# Altium PCB PCB_Test_Bench_Back_Scatter.PcbDoc
Units mil, origin at the board's own origin, x right, y up, seen from the top; angles counter-clockwise.
Board outline 6043.31 x 2165.35 mil, 2 copper layers (Top Layer, Bottom Layer); 13 components, 30 nets, 158 pads, 0 vias.
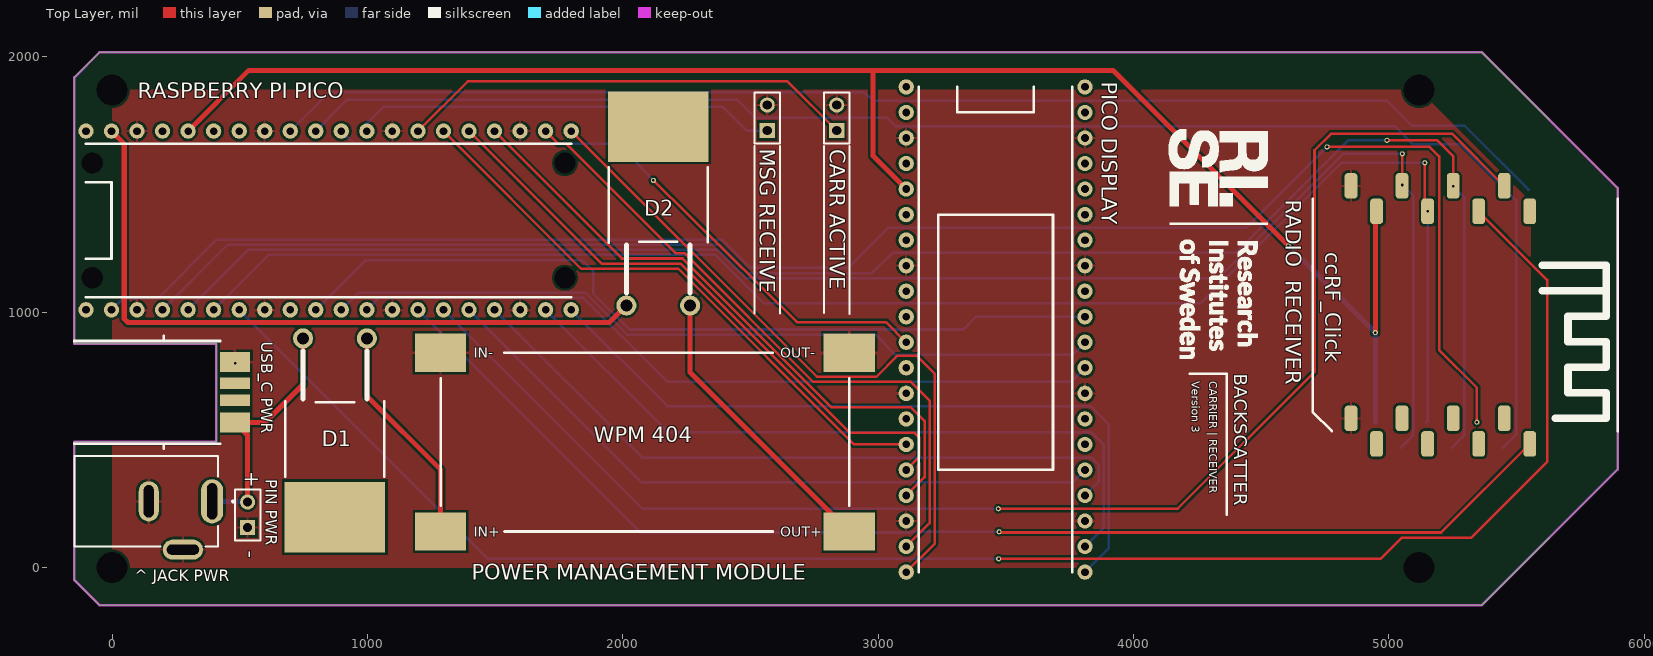
[diagram p0: Top Layer view]
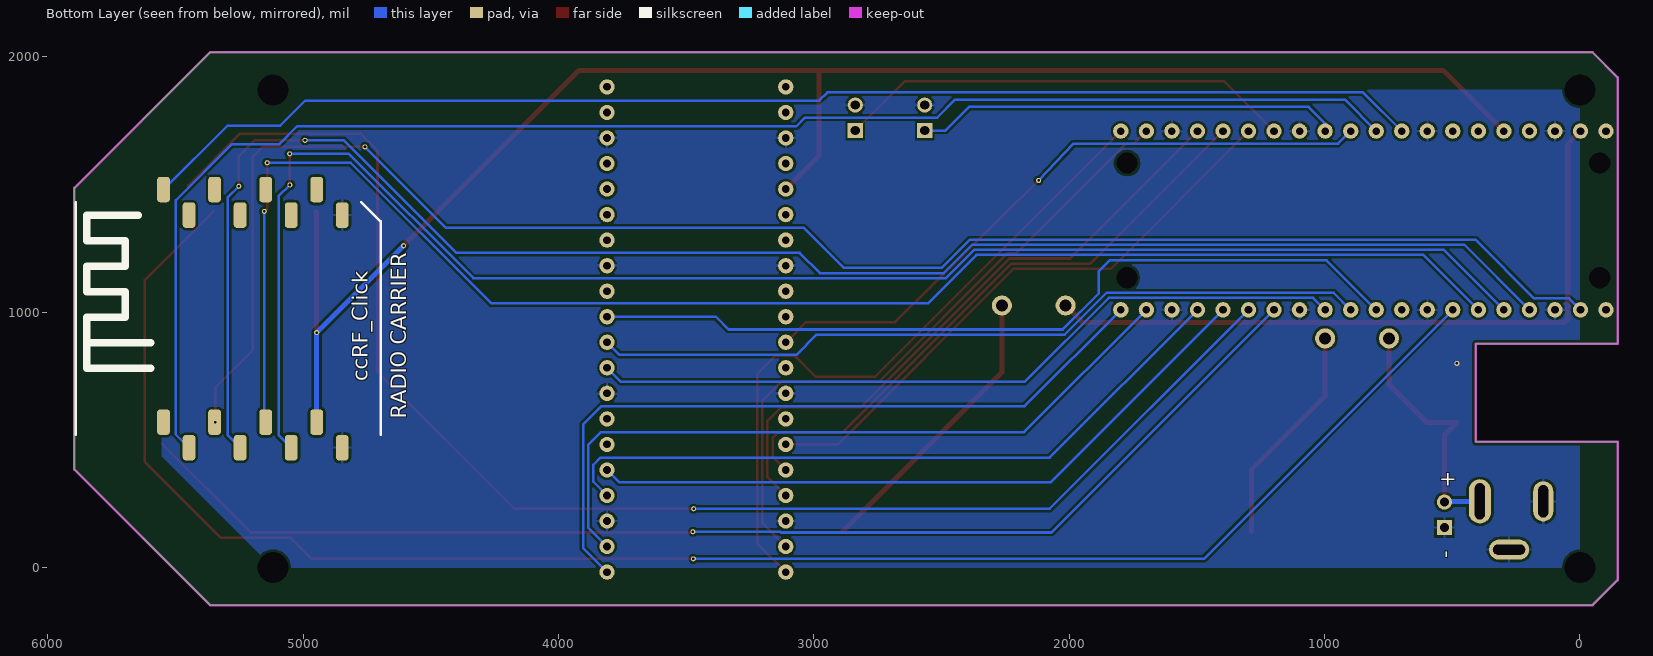
[diagram p1: Bottom Layer view, seen from below]

## Layer stack, top to bottom
Top Solder: solder mask 0.4, Solder Resist, Dk 3.5
Top Layer: signal copper 1.4
Dielectric 1: dielectric 12.6, FR-4, Dk 4.8
Bottom Layer: signal copper 1.4
Bottom Solder: solder mask 0.4, Solder Resist, Dk 3.5

## Board outline
-147.64,-49.21 -147.64,492 408,492 408,875.86 -147.64,875.86 -147.64,1919.29 -49.21,2017.72 5364.17,2017.72 5895.67,1486.22 5895.67,383.86 5364.17,-147.64 -49.21,-147.64

## Design rules (kind name [scope] priority, off if disabled: settings)
Clearance [All] p1: gap=10
PolygonConnect [All] p1: connectstyle=Relief reliefconductorwidth=10 reliefentries=4 polygonreliefangle="90 Angle" airgapwidth=10
RoutingVias [All] p1: holewidth=28 width=50 viastyle="Through Hole" minholewidth=28 minwidth=50 maxholewidth=28 maxwidth=50
SolderMaskExpansion [All] p1: expansion=4
UnpouredPolygon [All] p1: allowunpoured=FALSE
Width [All] p1: maxlimit=39.37 minlimit=10 preferedwidth=10
29 further rules are at their usual default settings.

## Components (designator, comment, footprint, x,y, rotation, side; value= is the part's Value field where it differs from the comment)
* "RISE_LOGO" RISE_Logo 4140,1717 r270 top
"^ JACK PWR" "DCJ200-10-A-XX-K_REVA" GCT_DCJ200-10-A-XX-K_REVA 134,259 r270 top (schematic designator J3)
"CARR ACTIVE" "LED_2" HDR1X2 2838,1711 r90 top (schematic designator P3)
D1 "Diode 18TQ045" 18TQ045-M3 998,897 r180 top
D2 "Diode 18TQ045" 18TQ045-M3 2014,1026 r0 top
"MSG RECEIVE" "LED_1" HDR1X2 2566,1711 r90 top (schematic designator P2)
"PICO DISPLAY" "Pico_Display" Pico_Display_Header 3110,1882 r0 top (schematic designator PI_DISP1)
"PIN PWR" "Header 2" HDR1X2 531,156 r90 top (schematic designator P1)
"POWER MANAGEMENT MODULE" "WPM_404" WPM404_SMD 1287,841 r0 top (schematic designator WPM1)
"RADIO  RECEIVER" "ccRF_Click" CCRF_CLICK_SMD 5552,1484 r270 top (schematic designator ccRF1)
"RADIO CARRIER" "ccRF_Click" CCRF_CLICK_SMD 5547,480 r90 bottom (schematic designator ccRF2)
"RASPBERRY PI PICO" "Raspberry Pi Pico" "Raspberry Pi Pico" -102,1009 r90 top (schematic designator PI1)
"USB_C PWR" "USB C Socket Breakout" Simple_USB_C_Socket_Breakout 423,505 r90 top (schematic designator USB_C1)

## Footprints (in the part's own frame and the unit in brackets; to place one, negate y for a bottom-side part, rotate by r counter-clockwise, add the part's x,y. Pads: shape width x height; smd on the part's side, far side on the other; paste and mask are expansions set on the pad)
18TQ045-M3 [mm]
  round 2 hole 1.2: 1(0,0) 3(6.35,0)
  rect 10x7 smd: ""(3.175,17.78)
  silkscreen extent -1.75,1.25 8.1,13.77
CCRF_CLICK_SMD [mm]
  rrect50% 2.54x1.27 smd: 0(2.27,0) 1(-0.27,-2.54) 2(2.27,-5.08) 3(-0.27,-7.62) 4(2.27,-10.16) 5(-0.27,-12.7) 6(2.27,-15.24) 7(-0.27,-17.78) 8(22.86,-17.78) 9(25.4,-15.24) 10(22.86,-12.7) 11(25.4,-10.16) 12(22.86,-7.62) 13(25.4,-5.08) 14(22.86,-2.54) 15(25.4,0)
  silkscreen extent 1,-21.59 24.13,8.75
GCT_DCJ200-10-A-XX-K_REVA [mm]
  oval 4.4x2.2 hole 1 slot 3.6 at 0 deg: 1(0,6.55)
  oval 4x2 hole 1 slot 3.2 at 0 deg: 2(0,0.25)
  oval 2x4 hole 1 slot 3.2 at 90 deg: 3(4.8,3.65)
  silkscreen extent -4.5,-7.15 4.5,8.75, body extent -4.5,-7.15 5.05,7.15, height 11
HDR1X2 [mm] "Connector; Header; 2 Position"
  rect 1.5x1.5 hole 0.9: 1(0,0)
  round 1.5 hole 0.9: 2(2.54,0)
  silkscreen extent -1.27,-1.27 3.81,1.27
Pico_Display_Header [mil]
  round 60 hole 30: 0(0,-200) 1(0,-400) 2(0,-700) 3(0,-1000) 4(0,-1200) 5(0,-1400) 6(0,-1500) 7(0,-1600) 8(0,-1700) 9(0,-1800) 10(0,-1900) 11(700,-1900) 12(700,-1800) 13(700,-1700) 14(700,-1600) 15(700,-1500) 16(700,-1200) 17(700,-1100) 18(700,-1000) 19(700,-900) 20(700,-700) 21(700,-200) NC(0,-1300) NC(0,-1100) NC(0,-900) NC(0,-800) NC(0,-600) NC(0,-500) NC(0,-300) NC(0,-100) NC(0,0) NC(700,-1400) NC(700,-1300) NC(700,-800) NC(700,-600) NC(700,-500) NC(700,-400) NC(700,-300) NC(700,-100) NC(700,0)
  silkscreen extent 50,-1900 650,0
"Raspberry Pi Pico" [mil]
  round 60 hole 30: 0(0,0) 1(0,-100) 2(0,-200) 3(0,-300) 4(0,-400) 5(0,-500) 6(0,-600) 7(0,-700) 8(0,-800) 9(0,-900) 10(0,-1000) 11(0,-1100) 12(0,-1200) 13(0,-1300) 14(0,-1400) 15(0,-1500) 16(0,-1600) 17(0,-1700) 18(0,-1800) 19(0,-1900) 20(700,-1900) 21(700,-1800) 22(700,-1700) 23(700,-1600) 24(700,-1500) 25(700,-1400) 26(700,-1300) 27(700,-1200) 28(700,-1100) 29(700,-1000) 30(700,-900) 31(700,-800) 32(700,-700) 33(700,-600) 34(700,-500) 35(700,-400) 36(700,-300) 37(700,-200) 38(700,-100) 39(700,0)
  round 60 hole 82.68: 51(125.59,-24.8) 51(125.59,-1875.2) 51(574.41,-24.8) 51(574.41,-1875.2)
  silkscreen extent 50,-1900 650,0
RISE_Logo [mil]
  silkscreen extent 0,0 900,386
Simple_USB_C_Socket_Breakout [mm] "Simple USB C Socket Breakout"
  rect 2x3 smd: 0(1.6,-1.5) 3(7.6,-1.5)
  rect 1.16x3 smd: 1(3.8,-1.5) 2(5.5,-1.5)
  silkscreen extent -1,0 10.2,14.5
WPM404_SMD [mil]
  rect 200x150 smd: 0(0,0) 1(0,-700) 2(1600,0) 3(1600,-700)
  silkscreen extent 0,-700 1600,0

## Part data
*: "RISE_Logo"
"^ JACK PWR": "Power Barrel Connector Jack 2.05mm ID (0.081), 5.50mm OD (0.217) Through Hole, Right Angle"
"CARR ACTIVE" "MSG RECEIVE": library part "Header 2", "Header, 2-Pin"
D1 D2: "Schottky Rectifier"
"PICO DISPLAY": library part Pico_Display_Header
"PIN PWR": "Header, 2-Pin"
"POWER MANAGEMENT MODULE": "Velleman WPM404 Whadda DC-DC Adjustable Voltage Step-Down Module LM2596S"
"RADIO  RECEIVER" "RADIO CARRIER": "ccRF_Click 2480MHz radio"
"RASPBERRY PI PICO": library part Raspberry_Pi_Pico_Header
"USB_C PWR": "Simple USB C Socket Breakout"

## Free pads (board coordinates)
  round 60 hole 122.05: FIX(0,0) FIX(0,1870.08) FIX(5118.11,0) FIX(5118.11,1870.08)
  round 20 hole 10: VIAS(482.06,799.21) VIAS(2120,1516) VIAS(3471,230) VIAS(3472,34) VIAS(3474,140) VIAS(4607,1260) VIAS(4758,1647) VIAS(4947,920) VIAS(4993,1673) VIAS(5052,1498) VIAS(5053,1620) VIAS(5141,1585) VIAS(5152,1394.63) VIAS(5252,1493) VIAS(5345,569)

## Nets (pads, with @x,y where several pads share a name; then routed paths per layer and width w, separated by ;. In a path a pad name is that pad's centre, name@x,y a point inside that pad or via, vN(x,y) a via of type N, cw(c..) or ccw(c..) an arc to the next point about the centre after c; other vN are vias at no path point)
GND: "^ JACK PWR.2" "^ JACK PWR.3" "CARR ACTIVE.2" "MSG RECEIVE.2" "PICO DISPLAY.0" "PICO DISPLAY.2" "PICO DISPLAY.4" "PICO DISPLAY.8" "PICO DISPLAY.13" "PICO DISPLAY.16" "PICO DISPLAY.20" "PICO DISPLAY.21" "PIN PWR.1" "POWER MANAGEMENT MODULE.0" "POWER MANAGEMENT MODULE.2" "RADIO  RECEIVER.7" "RADIO  RECEIVER.8" "RADIO CARRIER.7" "RADIO CARRIER.8" "RASPBERRY PI PICO.2" "RASPBERRY PI PICO.7" "RASPBERRY PI PICO.12" "RASPBERRY PI PICO.17" "RASPBERRY PI PICO.22" "RASPBERRY PI PICO.27" "RASPBERRY PI PICO.32" "RASPBERRY PI PICO.37" "USB_C PWR.3" pad.VIAS@482.06,799.21
NetccRF1_1: "RADIO  RECEIVER.1" "RASPBERRY PI PICO.14" pad.VIAS@3471,230 | length 5677.4
  Top Layer w10: pad.VIAS@3471,230 4173,230 4709,766 4709,1634 4773,1698 5248.63,1698 5452,1494.63
  Bottom Layer w10: 1298,1009 2077,230 pad.VIAS@3471,230
NetccRF1_2: "RADIO  RECEIVER.2" "RASPBERRY PI PICO.6" pad.VIAS@3472,34 | length 6774.9
  Top Layer w10: pad.VIAS@3472,34 4968,34 5051,117 5323,117 5620,414 5620,1126.63 5352,1394.63
  Bottom Layer w10: 498,1009 1473,34 pad.VIAS@3472,34
NetccRF1_3: "RADIO  RECEIVER.3" "RADIO CARRIER.3" "RASPBERRY PI PICO.3" pad.VIAS@4993,1673 pad.VIAS@5252,1493 | length 6625.2
  Top Layer w10: pad.VIAS@4993,1673 5190,1673 5252,1611 pad.VIAS@5252,1494.63
  Bottom Layer w10: 198,1009 453,1264 2380.57,1264 2491.57,1153 2977,1153 3056,1232 4400,1232 4841,1673 pad.VIAS@4993,1673 ; 5247,469.37 5296,518.37 5296,1449 pad.VIAS@5252,1493
NetccRF1_4: "RADIO  RECEIVER.4" "RADIO CARRIER.4" "RASPBERRY PI PICO.5" pad.VIAS@5141,1585 pad.VIAS@5152,1394.63 | length 6161.2
  Top Layer w10: pad.VIAS@5141,1585 5141,1405.63 pad.VIAS@5152,1394.63
  Bottom Layer w10: 398,1009 613,1224 2364,1224 2554,1034 4263,1034 4814,1585 pad.VIAS@5141,1585 ; 5147,569.37 5152,574.37 pad.VIAS@5152,1394.63
NetccRF1_5: "RADIO  RECEIVER.5" "RADIO CARRIER.5" "RASPBERRY PI PICO.4" pad.VIAS@5052,1498 pad.VIAS@5053,1620 | length 6293
  Top Layer w10: pad.VIAS@5052,1494.63 5053,1495.63 pad.VIAS@5053,1620
  Bottom Layer w10: 298,1009 533,1244 2372.28,1244 2483.28,1133 4333.72,1133 4820.72,1620 pad.VIAS@5053,1620 ; 5047,469.37 5096,518.37 5096,1454 pad.VIAS@5052,1498
NetccRF1_15: "RADIO  RECEIVER.15" "RASPBERRY PI PICO.13" pad.VIAS@3474,140 | length 4863.2
  Top Layer w10: pad.VIAS@3474,140 3474,137 5205,137 5552,484
  Bottom Layer w10: 1198,1009 2070,137 3128.64,137 3131.64,140 pad.VIAS@3474,140
NetccRF2_1: "RADIO CARRIER.1" "RASPBERRY PI PICO.30" | length 5905.3
  Bottom Layer w10: 798,1709 921,1832 2447,1832 2517,1762 3035,1762 3069,1728 5024,1728 5095,1657 5280,1657 5499,1438 5499,521.37 5447,469.37
NetccRF2_2: "RADIO CARRIER.2" "RASPBERRY PI PICO.1" pad.VIAS@4758,1647 pad.VIAS@5345,569 | length 6672.9
  Top Layer w10: pad.VIAS@4758,1647 5160,1647 5197,1610 5197,852 5345,704 pad.VIAS@5345,569
  Bottom Layer w10: -2,1009 43,1054 179.36,1054 409.36,1284 2388.85,1284 2499.85,1173 2883,1173 3041,1331 4442,1331 pad.VIAS@4758,1647
NetccRF2_15: "RADIO CARRIER.15" "RASPBERRY PI PICO.31" | length 5069.8
  Bottom Layer w10: 698,1709 850,1861 2947,1861 2980,1828 4992,1828 5090,1730 5297,1730 5547,1480
NetD1_1: "POWER MANAGEMENT MODULE.1" D1.1 | length 875.7
  Top Layer w20: D1.1 998,672 1287,383 1287,141
NetD1_3: "^ JACK PWR.1" "PIN PWR.2" "USB_C PWR.0" D1.3 | length 976.1
  Top Layer w20: 531,256 531,519.05 482.06,567.99 598.99,567.99 748,717 D1.3
  Bottom Layer w20: 391.87,259 528,259
NetD2_3: "POWER MANAGEMENT MODULE.3" D2.3 | length 1143.1
  Top Layer w20: D2.3 2264,764 2887,141
NetP2_1: "MSG RECEIVE.1" "RASPBERRY PI PICO.28" | length 1663.4
  Bottom Layer w10: 998,1709 998,1739 1063,1804 2392,1804 2485,1711 2566,1711
NetP3_1: "CARR ACTIVE.1" "RASPBERRY PI PICO.26" | length 1800.7
  Top Layer w10: 1198,1709 1393,1904 2645,1904 2838,1711
NetPI1_9: "PICO DISPLAY.19" "RASPBERRY PI PICO.9" | length 3276.3
  Bottom Layer w10: 798,1009 992,1203 1842,1203 1884,1161 1884,1074 2026,932 3334,932 3384,982 3810,982
NetPI1_10: "PICO DISPLAY.18" "RASPBERRY PI PICO.10" | length 3060.7
  Bottom Layer w10: 898,1009 965,1076 1853.72,1076 2017.72,912 2990,912 3069,833 3761,833 3810,882
NetPI1_11: "PICO DISPLAY.17" "RASPBERRY PI PICO.11" | length 2990.5
  Bottom Layer w10: 998,1009 1045,1056 1845.43,1056 2174.43,727 3755,727 3810,782
NetPI1_15: "PICO DISPLAY.15" "RASPBERRY PI PICO.15" | length 2712.3
  Bottom Layer w10: 1398,1009 2074,333 3761,333 3810,382
NetPI1_16: "PICO DISPLAY.14" "RASPBERRY PI PICO.16" | length 2759.8
  Bottom Layer w10: 1498,1009 2077,430 3836,430 3864,402 3864,336 3810,282
NetPI1_18: "PICO DISPLAY.12" "RASPBERRY PI PICO.18" | length 2833.8
  Bottom Layer w10: 1698,1009 2177,530 3834,530 3884,480 3884,156 3810,82
NetPI1_19: "PICO DISPLAY.11" "RASPBERRY PI PICO.19" | length 2908.9
  Bottom Layer w10: 1798,1009 2175,632 3832,632 3904,560 3904,76 3810,-18
NetPI1_20: "PICO DISPLAY.10" "RASPBERRY PI PICO.20" | length 2709.1
  Top Layer w10: 1798,1709 2760,747 2993,747 3076,830 3150,830 3222,758 3222,94 3110,-18
NetPI1_21: "PICO DISPLAY.9" "RASPBERRY PI PICO.21" | length 2550.9
  Top Layer w10: 1698,1709 1748,1659 1780,1659 2209,1230 2243,1230 2746,727 3128.64,727 3202,653.64 3202,174 3110,82
NetPI1_23: "PICO DISPLAY.7" "RASPBERRY PI PICO.23" | length 2475.7
  Top Layer w10: 1498,1709 1997,1210 2234.72,1210 2817.72,627 3128.64,627 3182,573.64 3182,354 3110,282
NetPI1_24: "PICO DISPLAY.6" "RASPBERRY PI PICO.24" | length 2409
  Top Layer w10: 1398,1709 1917,1190 2226.43,1190 2889.43,527 3143,527 3162,508 3162,434 3110,382
NetPI1_25: "PICO DISPLAY.5" "RASPBERRY PI PICO.25" | length 2320.2
  Top Layer w10: 1298,1709 1837,1170 2218.15,1170 2906.15,482 3110,482
NetPI1_29: "PICO DISPLAY.3" "RASPBERRY PI PICO.29" pad.VIAS@2120,1516 | length 2554.6
  Top Layer w10: pad.VIAS@2120,1516 2682,961 3031,961 3110,882
  Bottom Layer w10: 898,1709 947,1660 1983,1660 pad.VIAS@2120,1516
VCC: "PICO DISPLAY.1" "RADIO  RECEIVER.6" "RADIO CARRIER.6" "RASPBERRY PI PICO.35" pad.VIAS@4607,1260 pad.VIAS@4947,920 | length 6519.2
  Top Layer w19.68: 298,1709 536,1947 2980,1947 ; 3110,1482 2980,1612 2980,1947 ; pad.VIAS@4607,1260 3920,1947 2980,1947 ; pad.VIAS@4947,920 4947,1389.63 4952,1394.63
  Bottom Layer w19.68: pad.VIAS@4607,1260 4947,920 4947,569.37
VCC_OUT: "RASPBERRY PI PICO.38" D2.1 | length 2755.7
  Top Layer w20: -2,1709 48,1659 48,974 63,959 1947,959 D2.1
pads on no net: "PICO DISPLAY.NC" "RADIO  RECEIVER.0" "RADIO  RECEIVER.9" "RADIO  RECEIVER.10" "RADIO  RECEIVER.11" "RADIO  RECEIVER.12" "RADIO  RECEIVER.13" "RADIO  RECEIVER.14" "RADIO CARRIER.0" "RADIO CARRIER.9" "RADIO CARRIER.10" "RADIO CARRIER.11" "RADIO CARRIER.12" "RADIO CARRIER.13" "RADIO CARRIER.14" "RASPBERRY PI PICO.0" "RASPBERRY PI PICO.8" "RASPBERRY PI PICO.33" "RASPBERRY PI PICO.34" "RASPBERRY PI PICO.36" "RASPBERRY PI PICO.39" "RASPBERRY PI PICO.51" "USB_C PWR.1" "USB_C PWR.2" D1. D2.

## Polygon pours and split planes (outlines as drawn)
GND on Bottom Layer "Bottom Layer-No Net" (solid, remove dead copper, pour order 2): 0,1870.08 5118.11,1870.08 5554,1434.19 5554,909 5554,435.89 5118.11,0 0,0
GND on Top Layer "Bottom Layer-No Net" (solid, remove dead copper, pour order 4): 0,1870.08 5118.11,1870.08 5555,1433.19 5555,654 5555,436.89 5118.11,0 0,0

## Keep-outs
Keep-Out Layer:
  the board outline again, w10

## Silkscreen, mask and mechanical layers (free items; w line width, h text height)
Top Overlay:
  lines w9: 2516,995 2516,1651 ; 2616,995 2616,1651 ; 2788,997 2788,1651 ; 2888,994 2888,1651
  lines w10: 4220,758 4365.47,758 4365.47,206.82
  text "BACKSCATTER" at 4395,758 h51.18 r270
  text "Version 3" at 4227.68,728.47 h31.5 r270
  text "CARRIER | RECEIVER" at 4296.57,728.47 h31.5 r270
  text "+" at 511,321 h60
  text "-" at 561,36 h60 r90
Bottom Overlay:
  text "+" at 551,321 h60
  text "-" at 501,36 h60 r270

## Text inside footprints (layer, text, board x,y; h text height)
"POWER MANAGEMENT MODULE": Top Overlay "WPM 404" at 1887,491 h60; Top Overlay "OUT+" at 2617,121 h39.37; Top Overlay "OUT-" at 2617,821 h39.37; Top Overlay "IN-" at 1417,821 h39.37; Top Overlay "IN+" at 1417,121 h39.37